# Altium PCB ST14_POWER.PcbDoc
Units mm, origin at the board's own origin, x right, y up, seen from the top; angles counter-clockwise.
Board outline 37 x 21.3 mm, 2 copper layers (Top Layer, Bottom Layer), stack 1.576 mm thick; 21 components, 8 nets, 54 pads, 33 vias.
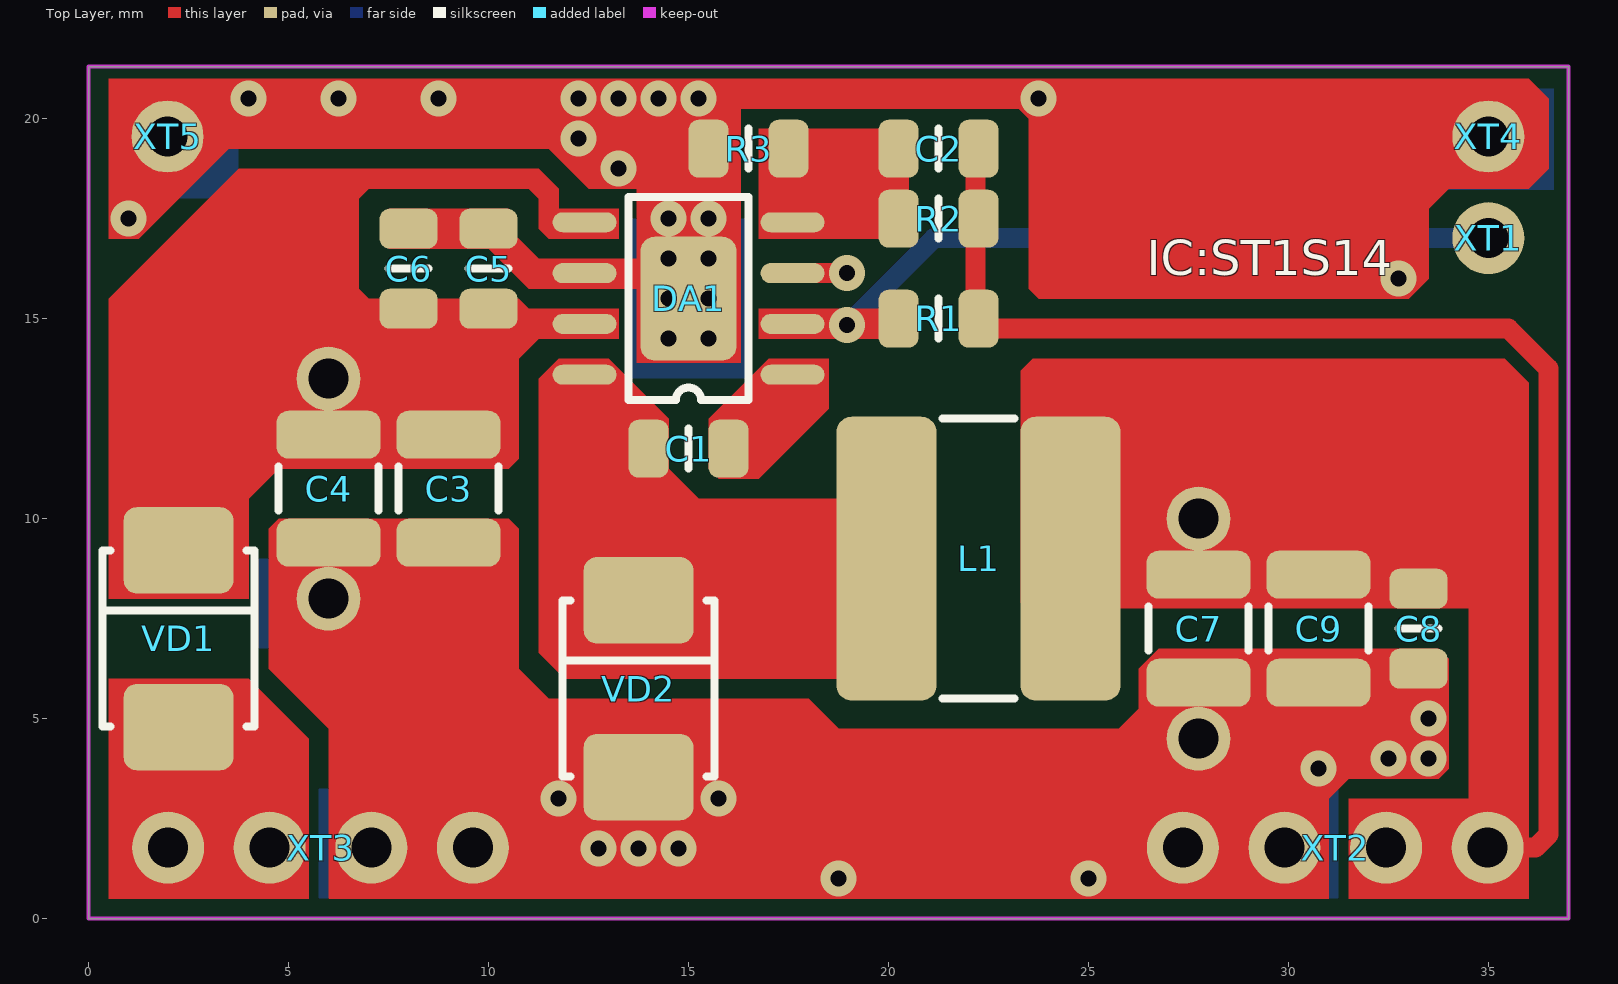
[diagram p0: Top Layer view]
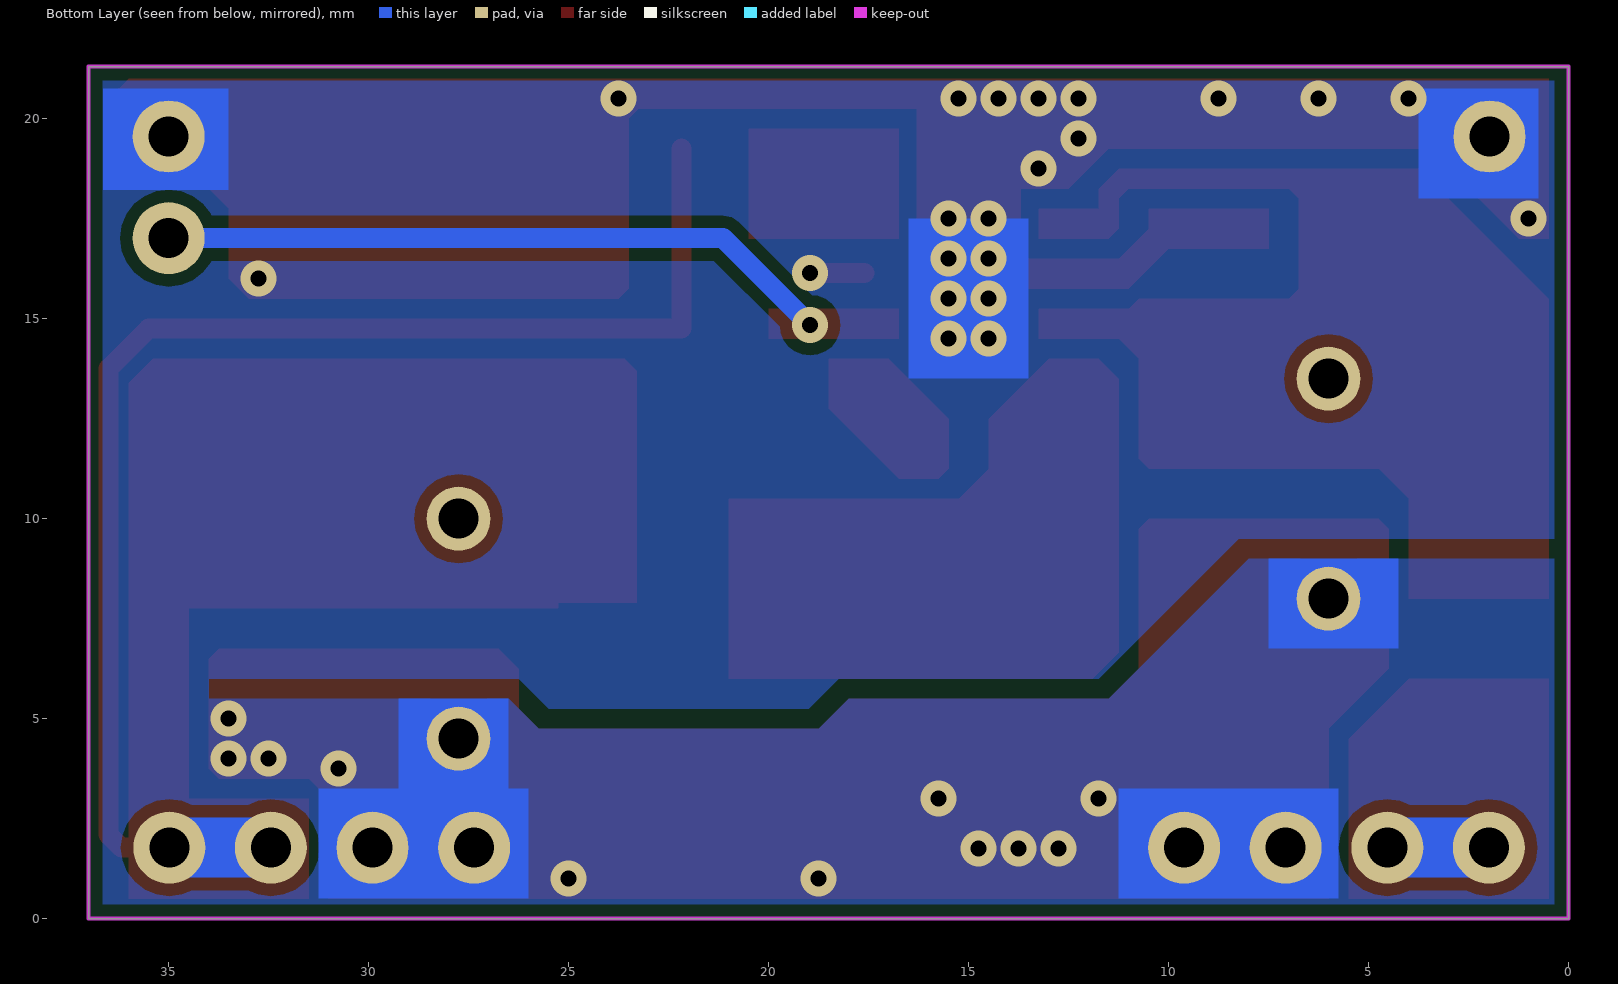
[diagram p1: Bottom Layer view, seen from below]
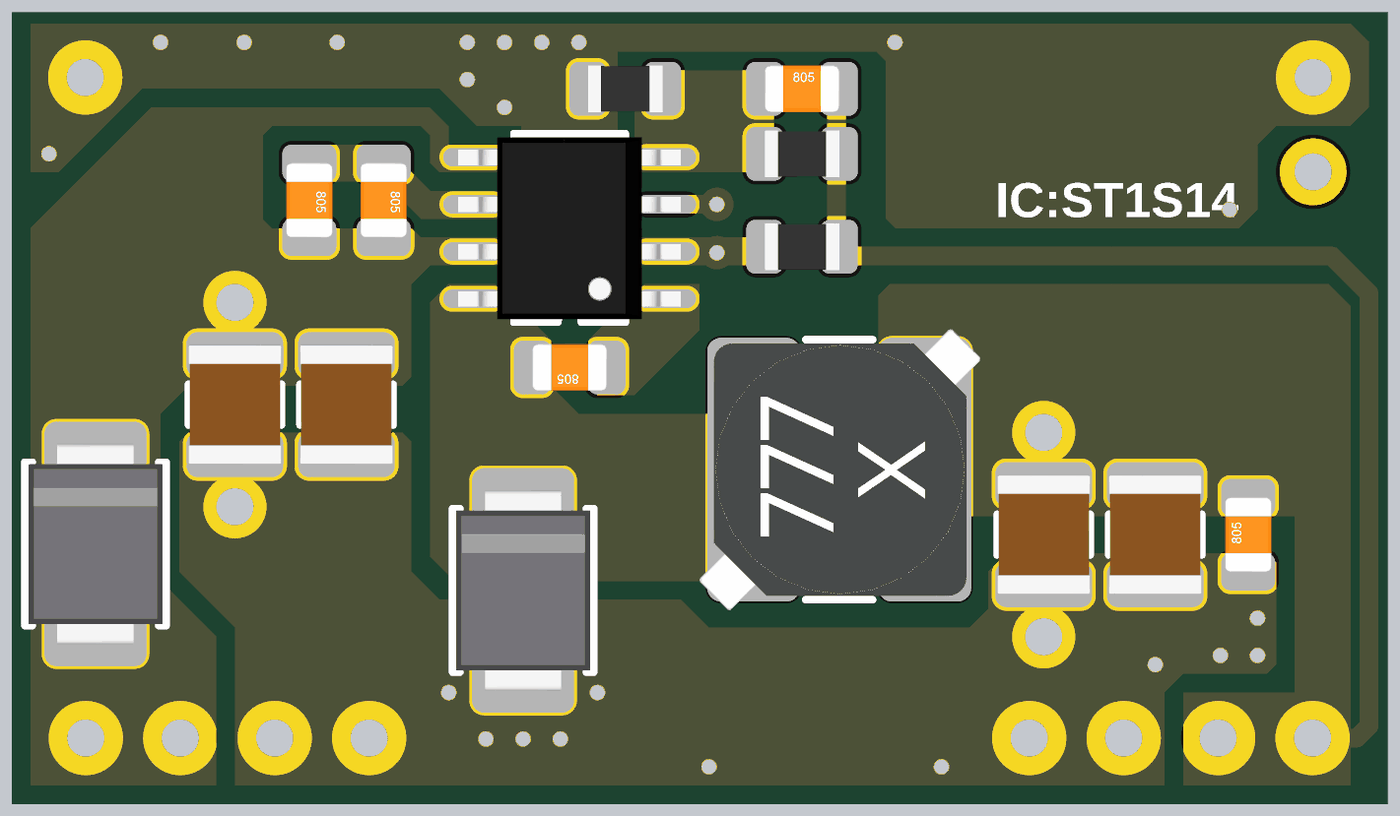
[diagram p2: 3D render of the assembled board from above, using the file's embedded part models]

## Layer stack, top to bottom
Top Solder: solder mask 0.012, Solder Resist, Dk 3.5
Top Layer: signal copper 0.018
Dielectric 1: dielectric 1.54, FR-4, Dk 4.8
Bottom Layer: signal copper 0.018
Bottom Solder: solder mask 0.012, Solder Resist, Dk 3.5

## Board outline
0,0 37,0 37,21.305 0,21.305

## Design rules (kind name [scope] priority, off if disabled: settings)
Clearance Clearance_Poly_Inner_Keepout [InPolygon AND OnMid vs (IsTrack AND OnLayer('Keep-Out Layer')) OR HoleSize] p1: gap=0.5
Clearance Clearance_Poly_Inner [InPolygon AND OnMid] p2: gap=0.3
Clearance Clearance_Poly [InPolygon] p3: gap=0.3
Clearance [All] p4: gap=0.2
ComponentClearance [All] p1: gap=0 collisioncheckmode=3 verticalgap=0 showdistances=FALSE
Height [All] p1: minheight=0 maxheight=100 prefheight=20
HoleSize [All] p1: absolutevalues=TRUE maxlimit=10 minlimit=0.3 maxpercent=80.000 minpercent=20.000
HoleToHoleClearance [All] p1: gap=0.3 allowstackedmicrovias=TRUE
MinimumSolderMaskSliver [All] p1: minsoldermaskwidth=0
PlaneClearance [All] p1: clearance=0.5
PlaneConnect [All] p1: planeconnectstyle=Relief reliefexpansion=0.508 reliefentries=4 reliefconductorwidth=0.4 reliefairgap=0.254
PolygonConnect PolygonConnect_Via [IsVia vs IsPolygon] p1: connectstyle=Direct reliefconductorwidth=0.254 reliefentries=4 polygonreliefangle="90 Angle" airgapwidth=0.254
PolygonConnect [All] p2: connectstyle=Relief reliefconductorwidth=0.4 reliefentries=4 polygonreliefangle="90 Angle" airgapwidth=0.3
RoutingVias [All] p1: holewidth=0.4 width=0.9 viastyle="Through Hole" minholewidth=0.3 minwidth=0.7 maxholewidth=3 maxwidth=5
SilkToSilkClearance [All] p1: silktosilkclearance=0.02
SilkToSolderMaskClearance SilkscreenOverComponentPads [IsPad] p1: minsilkscreentomaskgap=0.02 clearancetoexposedcopper=TRUE
SolderMaskExpansion [All] p1: expansion=0.05
Width [All] p1: maxlimit=10 minlimit=0.2 preferedwidth=0.5
21 further rules are at their usual default settings.

## Components (designator, comment, footprint, x,y, rotation, side; value= is the part's Value field where it differs from the comment)
C1 "0.1uF" C0805 15,11.75 r180 top
C2 "150pF" C0805 21.25,19.25 r0 top
C3 "10uF" C1210 9,10.75 r90 top
C4 "10uF" C1210 6,10.75 r90 top
C5 "68nF" C0805 10,16.25 r270 top
C6 "0.1uF" C0805 8,16.25 r270 top
C7 "NC" C1210 27.75,7.25 r90 top
C8 "NC" C0805 33.25,7.25 r90 top
C9 "NC" C1210 30.75,7.25 r90 top
DA1 "ST1S14" SO-8EPAD 15,15.5 r90 top
L1 "10uH" MSS7341 22.25,9 r90 top
R1 "47K" R0805 21.25,15 r0 top
R2 "4.7K" R0805 21.25,17.5 r0 top
R3 "2.7K" R0805 16.5,19.25 r0 top
VD1 "1N5819" "Diode SMB" 2.25,7 r90 top
VD2 "1N5819" "Diode SMB" 13.75,5.75 r90 top
XT1 "PLS-1" PLS-1_1 34.995,17.015 r0 top
XT2 "PLS-4" PLS-4_1 31.17,1.775 r180 top
XT3 "PLS-4" PLS-4_1 5.8,1.775 r0 top
XT4 "PLS-1" PLS-1_1 34.995,19.555 r0 top
XT5 "PLS-1" PLS-1_1 1.975,19.555 r0 top

## Footprints (in the part's own frame and the unit in brackets; to place one, negate y for a bottom-side part, rotate by r counter-clockwise, add the part's x,y. Pads: shape width x height; smd on the part's side, far side on the other; paste and mask are expansions set on the pad)
C0805 [mm]
  rrect50% 1x1.45 smd mask+0.1: 1(-1,0) 2(1,0)
  silkscreen extent 0,-0.5 0,0.5, body extent -1,-0.63 1,0.63, height 0.78
C1210 [mm] "Chip Capacitor, 1210 (3225 Metric), Body 3.2x2.5x2.5mm"
  rrect50% 1.2x2.6 smd mask+0.1: 1(-1.35,0) 2(1.35,0)
  silkscreen extent -0.55,-1.25 0.55,1.25, body extent -1.6,-1.25 1.6,1.25, height 2.5
"Diode SMB" [mm] "SMB Case Diode/Supressor"
  rrect30% 2.159x2.743 smd mask+0.075: 1(-2.21,0) 2(2.21,0)
  silkscreen extent -2.2,-1.9 2.2,1.9, body extent -2.7,-1.8 2.7,1.8, height 2.3
MSS7341 [mm] "Shielded Inductor, 7.1x7.1mm"
  rrect30% 7.1x2.5 smd mask+0.05: 1(0,-2.3) 2(0,2.3)
  silkscreen extent -3.5,-0.9 3.5,0.9, body extent -3.78,-3.78 3.78,3.76, height 4.1
PLS-1_1 [mm] "PLS-1 Connector 2.54mm pitch"
  round 1.8 hole 1 paste+0 mask+0.1: 1(0,0)
PLS-4_1 [mm] "PLS-4 Connector 2.54mm pitch"
  round 1.8 hole 1 paste+0 mask+0.1: 1(-3.81,0) 3(1.27,0) 4(3.81,0)
  round 1.8 hole 1 mask+0.1: 2(-1.27,0)
R0805 [mm]
  rrect50% 1x1.45 smd mask+0.1: 1(-1,0) 2(1,0)
  silkscreen extent 0,-0.5 0,0.5, body extent -1,-0.63 1,0.63, height 0.5
SO-8EPAD [mm] "Small Outline Integrated Circuit, 9 Pins"
  rrect30% 3.1x2.41 smd mask+0.05: 0(0,0)
  rrect100% 0.5x1.6 smd mask+0.1: 1(-1.9,-2.6) 2(-0.63,-2.6) 3(0.64,-2.6) 4(1.91,-2.6) 5(1.91,2.6) 6(0.64,2.6) 7(-0.63,2.6) 8(-1.9,2.6)
  silkscreen extent -2.53,-1.5 2.55,1.5, body extent -2.45,-3 2.45,3, height 1.6

## Part data
C1 C2 C3 C4 C5 C6 C7 C8 C9: library part C, "Capacitor"
DA1: "Up to 3 A step-down switching regulator"
L1: library part L, "Inductor"
R1 R2 R3: library part R, "Resistor"
VD1 VD2: library part "Diode Shottky", "Diode"
XT1 XT4 XT5: "Pin Header Pitch 2.54mm 1 Pin"
XT2 XT3: "Pin Header Pitch 2.54mm 4pins"

## Free pads (board coordinates)
  round 1.6 hole 1: 4(6,8) 4(6,13.5) 4(27.75,4.5) 4(27.75,10)

## Via types
v1: diameter 0.9, hole 0.4, Top Layer to Bottom Layer, tented both sides, 27 vias
v2: diameter 0.9, hole 0.4, Top Layer to Bottom Layer, 6 vias

## Nets (pads, with @x,y where several pads share a name; then routed paths per layer and width w, separated by ;. In a path a pad name is that pad's centre, name@x,y a point inside that pad or via, vN(x,y) a via of type N, cw(c..) or ccw(c..) an arc to the next point about the centre after c; other vN are vias at no path point)
GND: C3.1 C4.1 C5.1 C6.1 C7.1 C8.1 C9.1 DA1.0 DA1.3 DA1.6 pad.4@6,8 pad.4@27.75,4.5 R3.1 VD2.1 XT2.3 XT2.4 XT3.3 XT3.4 XT4.1 XT5.1 | length 1.4
  Top Layer w0.5: DA1.3 v1(18.96,16.14)
  other v1: 18.75,1 25,1 12.75,1.75 13.75,1.75 14.75,1.75 11.75,3 15.75,3 30.75,3.75 32.5,4 33.5,4 33.5,5 32.75,16 1,17.5 14.5,17.5 15.5,17.5 13.25,18.75 12.25,19.5 4,20.5 6.25,20.5 8.75,20.5 12.25,20.5 13.25,20.5 14.25,20.5 15.25,20.5 23.75,20.5
  other v2: 14.5,14.5 15.5,14.5 14.5,15.5 15.5,15.5 14.5,16.5 15.5,16.5
NetC1_1: C1.1 DA1.1
NetC1_2: C1.2 DA1.8 L1.2 VD2.2
NetC2_1: C2.1 DA1.4 R2.1 R3.2
NetDA1_2: DA1.2 R1.1 XT1.1 | length 16.9
  Bottom Layer w0.5: v1(18.96,14.84) 21.135,17.015 XT1.1
NetVD1_1: VD1.1 XT3.1 XT3.2 | length 2.5
  Bottom Layer w1.5: XT3.1 XT3.2@4.5,1.775
VIN: C3.2 C4.2 C5.2 C6.2 DA1.5 DA1.7 pad.4@6,13.5 VD1.2
VOUT: C2.2 C7.2 C8.2 C9.2 L1.1 pad.4@27.75,10 R1.2 R2.2 XT2.1 XT2.2 | length 35
  Top Layer w0.5: C2.2@22.18,19.25 22.18,14.75 35.5,14.75 36.5,13.75 36.5,2.1 36.175,1.775 XT2.1@34.995,1.775
  Bottom Layer w1.5: XT2.2@32.47,1.775 XT2.1

## Polygon pours and split planes (outlines as drawn)
GND on Bottom Layer "Top Layer-No Net" (solid, pour order 0): 0,0 0,21.25 37,21.25 37,0

## Keep-outs
Keep-Out Layer:
  the board outline again, w0.1

## Other copper
Top Layer:
  rectangle net VOUT: 34.5,0.5 36,9.5
  region net VOUT: 36,7.75 36,9.5 25.25,9.5 25.25,7.75
  region net VIN: 0.5,8 4,8 4,10.5 4.75,11.25 10.5,11.25 10.75,11.5 10.75,14 11.25,14.5 13.25,14.5 13.25,15.25 11,15.25 10.75,15.5 7,15.5 6.75,15.75 6.75,18 7,18.25 11,18.25 11.25,18 11.25,17.25 11.5,17 13.25,17 13.25,17.75 11.75,17.75 11.75,18.25 11.25,18.75 3.75,18.75 0.5,15.5
  region net GND: 14.25,16.5 14.25,15.75 11,15.75 10,16.75 7.5,16.75 7.5,17.75 10.5,17.75 10.5,17.25 11.25,16.5
  region net NetVD1_1: 0.5,0.5 0.5,6 4,6 5.5,4.5 5.5,0.5
  region net NetC1_2: 13,14 11.75,14 11.25,13.5 11.25,6.65 11.9,6 21,6 21,10.5 15.25,10.5 14.5,11.25 14.5,12.5
  region net NetC1_1: 15.75,11 15.5,11.25 15.5,12.5 17,14 18.5,14 18.5,12.75 16.75,11
  region net NetDA1_2: 16.75,14.5 16.75,15.25 20,15.25 20,14.5
  region net NetC2_1: 16.75,17 16.75,19.75 20.5,19.75 20.5,17
  region net VOUT: 23.3,13.7 23.3,7.9 32.4,7.9 34.5,7.9 34.5,7.4 34.5,3 31.5,3 31.5,0.5 36,0.5 36,13.4 35.4,14 23.6,14
  region net GND: 13.7,13.9 16.3,13.9 16.3,20.5 13.7,20.5
  pour cut-out: 4,9.25 4,5.2 0.5,5.2 0.5,9.3
  region net GND: 6,0.5 6,4.75 4.5,6.25 4.5,9.75 4.75,10 10.5,10 10.75,9.75 10.75,6.25 11.5,5.5 18,5.5 18.75,4.75 25.75,4.75 26.25,5.25 26.25,5.75 26.25,6.25 26.75,6.75 33.75,6.75 34,6.5 34,3.75 33.75,3.5 31.5,3.5 31,3 31,0.5
  region net GND: 0.5,17 1.25,17 3.5,19.25 11.5,19.25 12.5,18.25 16.25,18.25 16.25,20.25 23.25,20.25 23.5,20 23.5,15.75 23.75,15.5 33,15.5 33.5,16 33.5,17.75 34,18.25 36,18.25 36.5,18.75 36.5,20.5 36,21 0.5,21
Bottom Layer:
  region net GND: 16.5,17.5 13.5,17.5 13.5,15.5 16.5,15.5
  rectangle net GND: 13.5,13.5 16.5,15.5
  rectangle net GND: 5.75,0.5 11.25,3.25
  rectangle net GND: 4.25,6.75 7.5,9
  rectangle net GND: 26,0.5 31.249,3.25
  rectangle net GND: 26.5,3.25 29.25,5.5
  rectangle net GND: 33.5,18.215 36.643,20.75
  rectangle net GND: 0.75,18 3.75,20.75
  pour cut-out: 0,9 8,9 11.5,5.5 18,5.5 18.75,4.75 25.75,4.75 26.25,5.25 26.5,5.5 34,5.5 34,6 26.25,6 25.75,5.5 25.5,5.25 19,5.25 18.25,6 11.75,6 11.25,6.5 8.25,9.5 0,9.5

## Silkscreen, mask and mechanical layers (free items; w line width, h text height)
Top Overlay:
  text "IC:ST1S14" at 26.45,15.8 h1.5